# Allegro board 2-lianxi_finsh.brd
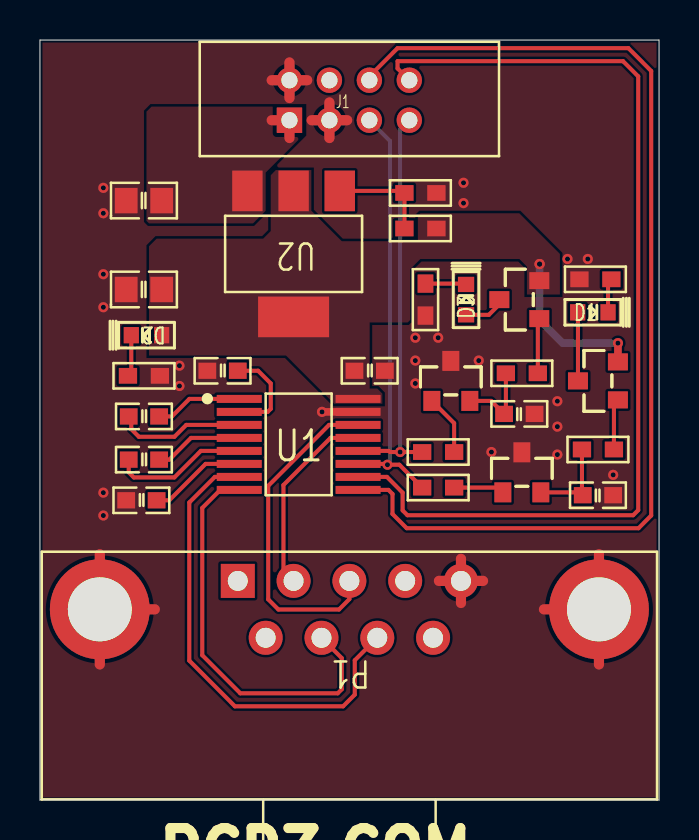
[diagram p0: board, top side]
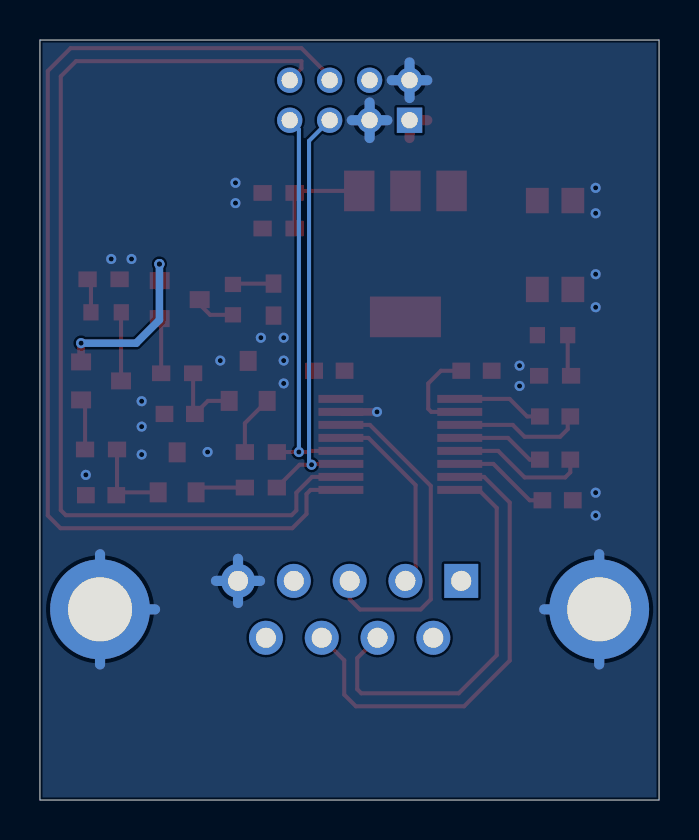
[diagram p1: board, bottom side, seen from below]

Outline 31 x 38 mm; copper layers: TOP, BOTTOM. Coordinates in mm from the lower left corner of the outline.
Outline path: 0,38 0,0 31,0 31,38 0,38

## Design rules (mm)
constraint set DEFAULT: min track width 0.203
nets with their own width: min track width 0.254; nets GND

## Placement (name value [footprint] x y rotation side)
C1  0.1uF  [C0603]  5.21 19.18 180 top
C2  0.1uF  [C0603]  9.14 21.46 180 top
C3  0.1uF  [C0603]  16.51 21.46 180 top
C4  0.1uF  [C0603]  5.08 14.99 180 top
C5  0.1uF  [C0603]  5.21 17.02 180 top
C6  1uF  [C0603]  27.94 15.24 0 top
C7  10uF  [C0805]  5.21 29.97 180 top
C8  10uF  [C0805]  5.21 25.53 180 top
C9  1uF  [C0603]  24 19.3 0 top
D1  LED_GREEN  [LED0603]  27.69 24.38 0 top
D2  LED_GREEN  [LED0603]  5.33 23.24 180 top
D3  LED_GREEN  [LED0603]  21.34 25.02 90 top
J1  CONNECTOR  [DIP_2X4_2MM]  15.49 34.99 0 top
P1  -  [DB9_MALE]  27.99 9.53 180 top
Q1  2N5401  [SOT-23]  27.94 20.95 90 top
Q2  2N5401  [SOT-23]  24.13 16.38 0 top
Q3  2N5401  [SOT-23]  24 25.02 90 top
Q4  2N5401  [SOT-23]  20.57 20.95 0 top
R1  1K  [R0603]  27.94 17.53 0 top
R2  1K  [R0603]  19.94 15.62 0 top
R3  470R  [R0603]  27.81 26.04 180 top
R4  470R  [R0603]  5.21 21.21 0 top
R5  50K/1%  [R0603]  19.05 30.35 0 top
R6  82K/1%  [R0603]  19.05 28.57 0 top
R7  1K  [R0603]  24.13 21.34 0 top
R8  1K  [R0603]  19.94 17.4 0 top
R9  470R  [R0603]  19.3 25.02 270 top
U1  SP3232EEY  [TSSOP16]  12.95 17.78 0 top
U2  -  [LM1117-ADJ]  12.7 27.3 180 top

## Library data of the parts
C1-C5 = CAP NP_3
C6-C9 = CAP NP_2
D1 D3 = LED_5
D2 = LED_6
J1 = CONNECTOR_1
P1 = DB9_MALE_1
Q1-Q4 = 2N5401_2
R1-R9 = RES_2
U1 = SP3232EEY_1
U2 = LM1117_0

## Footprints (pads in the part's own frame, mm; a bottom-side part is the same pattern mirrored in y, then rotated)
C0603
  rect 0.889x0.813 smd: 1(-0.762,0) 2(0.762,0)
C0805
  rect 1.143x1.27 smd: 1(-0.889,0) 2(0.889,0)
DB9_MALE
  rect 1.7x1.7 hole 1: 1(18.085,-1.422)
  round 1.7 hole 1: 2(15.291,-1.422) 3(12.497,-1.422) 4(9.703,-1.422) 5(6.909,-1.422) 6(16.688,1.422) 7(13.894,1.422) 8(11.1,1.422) 9(8.306,1.422)
  round 5 hole 3.2: 10(0,0) 11(24.994,0)
DIP_2X4_2MM
  rect 1.27x1.27 hole 0.813: 1(-3,-1)
  round 1.27 hole 0.813: 2(-3,1) 3(-1,-1) 4(-1,1) 5(1,-1) 6(1,1) 7(3,-1) 8(3,1)
LED0603
  rect 0.762x0.813 smd: 1(-0.76,0) 2(0.76,0)
LM1117-ADJ
  rect 1.524x2.032 smd: 1(-2.311,-3.15) 2(0,-3.15) 3(2.311,-3.15)
  rect 3.556x2.032 smd: 4(0,3.15)
R0603
  rect 0.914x0.787 smd: 1(-0.8,0) 2(0.8,0)
SOT-23
  rect 0.85x1 smd: 1(-0.95,-1) 2(0.95,-1) 3(0,1)
TSSOP16
  rect 2.25x0.4 smd: 1(-2.975,2.275) 2(-2.975,1.625) 3(-2.975,0.975) 4(-2.975,0.325) 5(-2.975,-0.325) 6(-2.975,-0.975) 7(-2.975,-1.625) 8(-2.975,-2.275) 9(2.975,-2.275) 10(2.975,-1.625) 11(2.975,-0.975) 12(2.975,-0.325) 13(2.975,0.325) 14(2.975,0.975) 15(2.975,1.625) 16(2.975,2.275)

## Nets
GND: C2.2 C3.1 C4.2 C6.2 C7.2 C8.2 C9.2 J1.2(8) J1.3 P1.5 P1.10 P1.11 Q2.3 Q4.3 R3.2 R4.2 R5.2 R9.2 U1.15
VCC_3V3: C3.2 C8.1 D2.1 Q1.2(EMITTER) Q3.2(EMITTER) R6.2 U1.16(VCC) U2.2 U2.4(TAB)
VIN_5V: C7.1 J1.1 U2.3
RS232_CTS: P1.8 U1.7
RS232_RTS: P1.7 U1.8
RS232_RXD: P1.2 U1.13
RS232_TXD: P1.3 U1.14
UART_CTS: J1.8 U1.10
UART_RTS: J1.6 U1.9
UART_RXD: J1.7 R8.1 U1.12
UART_TXD: J1.5 R2.1 U1.11
N23451873: C1.1 U1.1
N23451905: C5.1 U1.4
N23451907: C1.2 U1.3
N23451913: C4.1 U1.6
N23451915: C2.1 U1.2
N23451921: C5.2 U1.5
N23452119: R5.1 R6.1 U2.1
N23452223: Q2.1 R2.2
N23452239: Q1.1 R1.2
N23452241: C6.1 Q2.2(EMITTER) R1.1
N23452262: D1.1 Q1.3
N23452331: Q4.1 R8.2
N23452347: Q3.1 R7.2
N23452349: C9.1 Q4.2(EMITTER) R7.1
N23452367: D3.1 Q3.3
N23452380: D3.2(CATHODE) R9.1
N234520751: D2.2(CATHODE) R4.1
N234522811: D1.2(CATHODE) R3.1

Pads without a net: J1 4; P1 1 4 6 9

## Via types
v1: diameter 0.508, hole 0.254, TOP to BOTTOM, 28 vias

## Routing (per net, layer and track width the routed paths; a pad name or vN(x,y) marks a point on that pad's centre or on a via; arc(x,y) is an arc through that point)
GND: length 57.9
  TOP w0.381: U1.15 v1(14.12,19.4)
  TOP w0.508: 19.98,10.96 P1.5 ; P1.5 22.19,10.96 ; P1.5 21.08,12.06 ; P1.5 21.08,9.85 ; 25.24,9.53 P1.10 ; P1.10 27.99,6.78 ; P1.10 27.99,12.29 ; 11.6,35.99 J1.2 ; J1.2 12.49,35.1 ; J1.2 12.49,36.88 ; J1.2 13.38,35.99 ; 13.6,33.99 J1.3 ; J1.3 15.38,33.99 ; J1.3 14.49,33.1 ; J1.3 14.49,34.88 ; 3,6.78 P1.11 ; P1.11 3,12.29 ; P1.11 5.75,9.53
  BOTTOM w0.508: 25.24,9.53 P1.10 ; P1.10 27.99,12.29 ; P1.10 27.99,6.78 ; P1.5 21.08,12.06 ; P1.5 19.98,10.96 ; P1.5 21.08,9.85 ; P1.5 22.19,10.96 ; J1.2 13.38,35.99 ; J1.2 12.49,36.88 ; J1.2 12.49,35.1 ; J1.2 11.6,35.99 ; 3,6.78 P1.11 ; P1.11 3,12.29 ; P1.11 5.75,9.53 ; 13.6,33.99 J1.3 ; J1.3 14.49,33.1 ; J1.3 14.49,34.88 ; J1.3 15.38,33.99
  vias: v1(3.17,30.61) v1(3.17,29.34) v1(3.17,26.29) v1(3.17,24.64) v1(3.17,15.37) v1(3.17,14.22) v1(6.99,21.72) v1(6.99,20.7) v1(18.8,23.11) v1(18.8,21.97) v1(18.8,20.83) v1(19.94,23.11) v1(21.21,30.86) v1(21.21,29.84) v1(21.97,21.97) v1(22.61,17.4) v1(25.91,19.94) v1(25.91,18.67) v1(25.91,17.27) v1(26.42,27.05) v1(27.43,27.05) v1(28.7,16.26)
VCC_3V3: length 8.1
  TOP w0.381: Q1.2 v1(28.94,22.84)
  BOTTOM w0.381: v1(25.02,26.8) 25.02,24 26.18,22.84 v1(28.94,22.84)
VIN_5V: length 1.8
  TOP w0.508: 12.49,33.1 J1.1 11.6,33.99
RS232_CTS: length 23.7
  TOP w0.203: U1.7 8.76,16.16 7.48,14.87 7.48,6.97 9.76,4.68 15.18,4.68 15.76,5.27 15.76,6.99 16.89,8.11 P1.8
RS232_RTS: length 20.4
  TOP w0.203: P1.7 15.11,7.09 15.11,5.54 14.91,5.33 10.03,5.33 8.13,7.24 8.13,14.61 9.03,15.5 U1.8
RS232_RXD: length 9.7
  TOP w0.203: U1.13 14.55,18.1 12.19,15.75 12.19,11.46 P1.2
RS232_TXD: length 16.8
  TOP w0.203: P1.3 15.49,10.04 14.97,9.53 11.94,9.53 11.43,10.03 11.43,15.71 14.48,18.76 U1.14
UART_CTS: length 50.7
  TOP w0.203: U1.10 17.37,16.16 18.16,15.37 18.16,14.48 18.4,14.24 29.7,14.24 29.96,14.49 29.96,36.18 29.19,36.94 17.91,36.94 17.91,36.58 J1.8
UART_RTS: length 53.9
  TOP w0.203: U1.9 17.45,15.5 17.65,15.3 17.65,14.3 18.36,13.59 29.97,13.59 30.61,14.22 30.61,36.45 29.46,37.59 17.91,37.59 16.49,36.18 J1.6
UART_RXD: length 20
  TOP w0.203: R8.1 18.45,17.4 18.45,17.4 18.16,17.4 18.16,17.4 v1(18.03,17.4) 17.53,17.4 17.47,17.46 U1.12
  BOTTOM w0.203: J1.7 18.03,33.53 v1(18.03,17.4)
UART_TXD: length 21.4
  TOP w0.203: U1.11 17.36,16.8 v1(17.4,16.76) 18,16.76 R2.1
  BOTTOM w0.203: J1.5 17.53,32.96 17.53,16.89 v1(17.4,16.76)
N23451873: length 4.4
  TOP w0.203: U1.1 7.48,20.06 6.6,19.18 C1.1
N23451905: length 4.5
  TOP w0.203: U1.4 7.56,18.1 6.48,17.02 C5.1
N23451907: length 6.5
  TOP w0.203: U1.3 7.33,18.76 6.73,18.16 4.95,18.16 4.57,18.54 4.57,19.05 C1.2
N23451913: length 4.9
  TOP w0.203: U1.6 8.3,16.8 6.48,14.99 C4.1
N23451915: length 4.8
  TOP w0.203: U1.2 11.4,19.4 11.56,19.56 11.56,20.83 10.92,21.46 C2.1
N23451921: length 6.8
  TOP w0.203: U1.5 8.06,17.46 6.73,16.13 4.7,16.13 4.45,16.38 C5.2
N23452119: length 5.1
  TOP w0.203: R6.1 R5.1 18.15,30.45 U2.1
N23452223: length 2.5
  TOP w0.203: Q2.1 22.94,15.62 R2.2
N23452239: length 2.6
  TOP w0.203: Q1.1 28.74,19.81 R1.2
N23452241: length 4.4
  TOP w0.203: R1.1 27.14,15.28 ; 27.14,15.28 C6.1 ; 27.14,15.28 27.03,15.38 Q2.2
N23452262: length 3.4
  TOP w0.203: D1.1 26.94,24.37 Q1.3
N23452331: length 3
  TOP w0.203: R8.2 20.74,18.84 Q4.1
N23452347: length 2.8
  TOP w0.203: R7.2 24.93,24 Q3.1
N23452349: length 4.1
  TOP w0.203: R7.1 23.33,19.39 C9.1 22.59,19.96 Q4.2
N23452367: length 2.1
  TOP w0.203: Q3.3 23,24.78 22.48,24.26 21.34,24.26 D3.1
N23452380: length 2
  TOP w0.203: D3.2 21.3,25.82 R9.1
N234520751: length 2.1
  TOP w0.203: R4.1 4.57,21.38 D2.2
N234522811: length 1.7
  TOP w0.203: D1.2 28.45,25.87 R3.1

## Copper pours and planes (outline as drawn; the poured copper is in the pictures)
GND on TOP, BOTTOM: 0.13,37.87 30.87,37.87 30.87,0.13 0.13,0.13
VCC_3V3 on TOP: 5.46,27.69 5.46,22.23 12.32,22.23 14.73,19.81 17.14,19.81 17.14,20.32 16.89,20.57 16.51,20.57 16.51,23.88 18.41,23.88 18.54,24 18.54,26.54 19.05,27.05 24,27.05 24.38,26.67 24.38,25.27 26.04,25.27 26.04,27.3 24,29.34 19.05,29.34 18.92,29.21 18.92,27.94 15.11,27.94 13.59,29.46 13.59,31.5 11.81,31.5 11.56,31.24 11.56,28.45 11.18,28.07 5.84,28.07
VIN_5V on TOP: 5.33,34.42 5.33,28.96 5.46,28.83 10.67,28.83 11.3,29.46 11.3,31.37 13.21,33.27 13.21,34.67 5.59,34.67

## Text on the board
Ref Des/Silkscreen Top: PCB3.COM
